# Altium PCB PCB2.PcbDoc
Units mil, origin at the board's own origin, x right, y up, seen from the top; angles counter-clockwise.
Board outline 6000 x 4000 mil, 2 copper layers (Top Layer, Bottom Layer); 128 components, 0 nets, 416 pads, 0 vias.
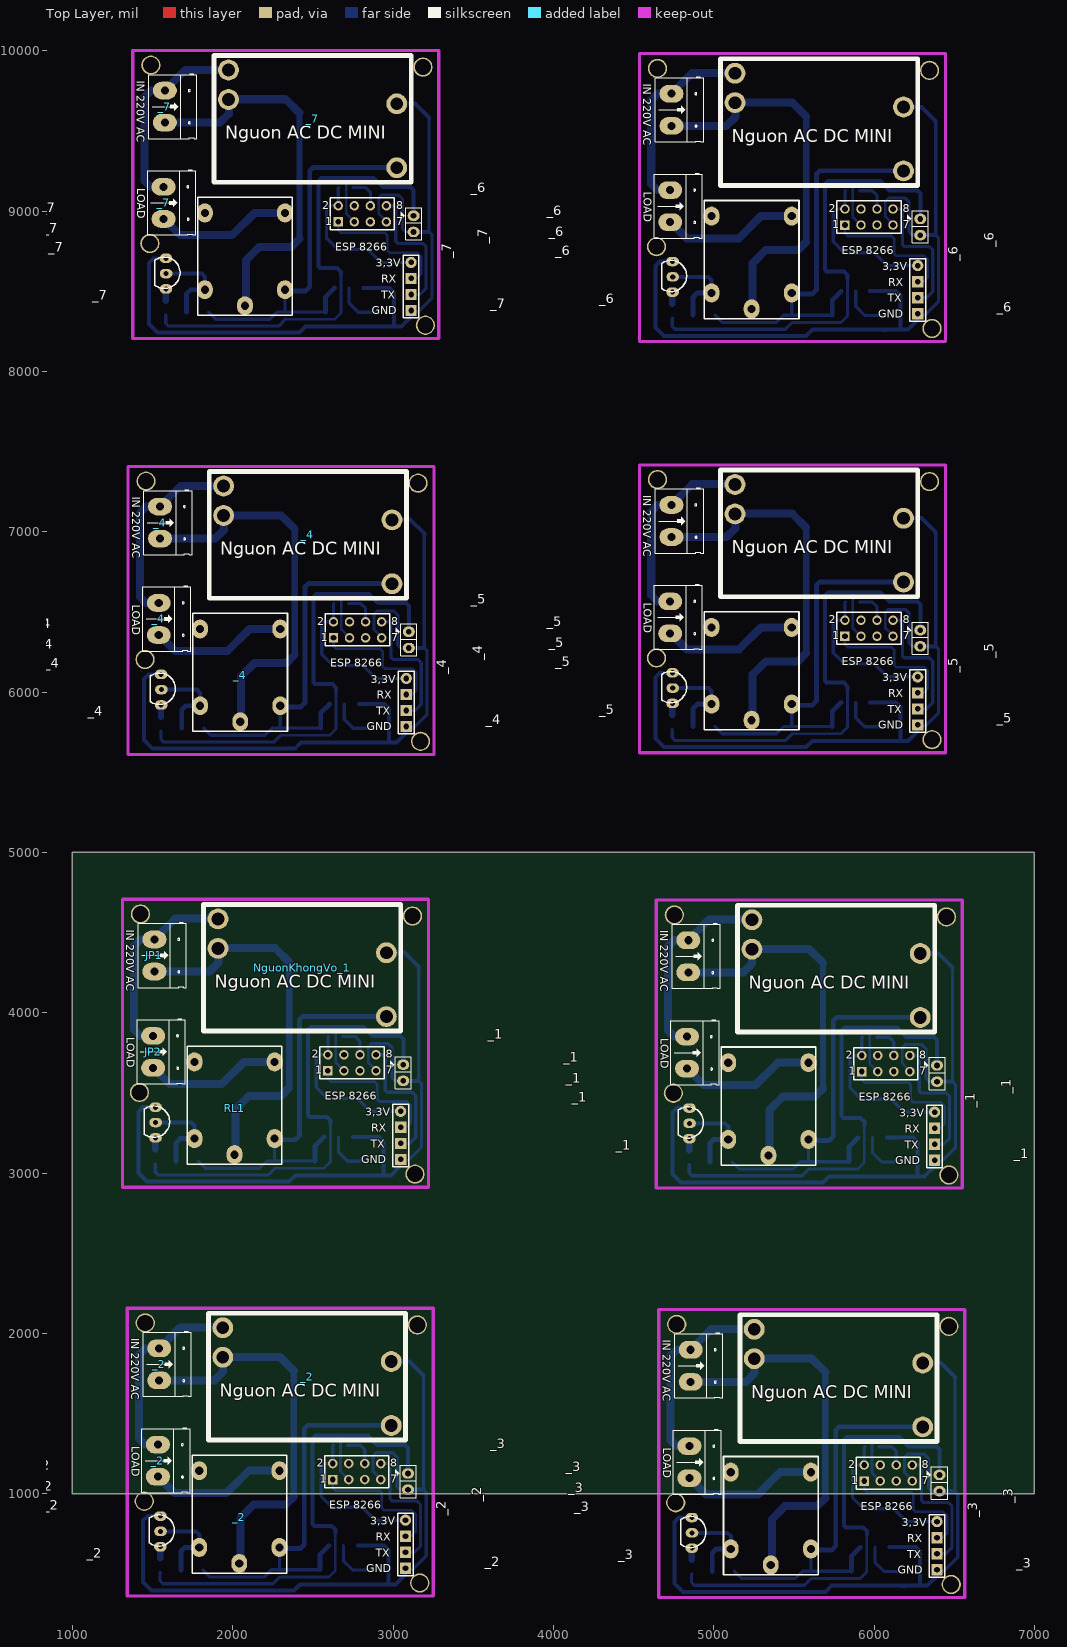
[diagram p0: Top Layer view]
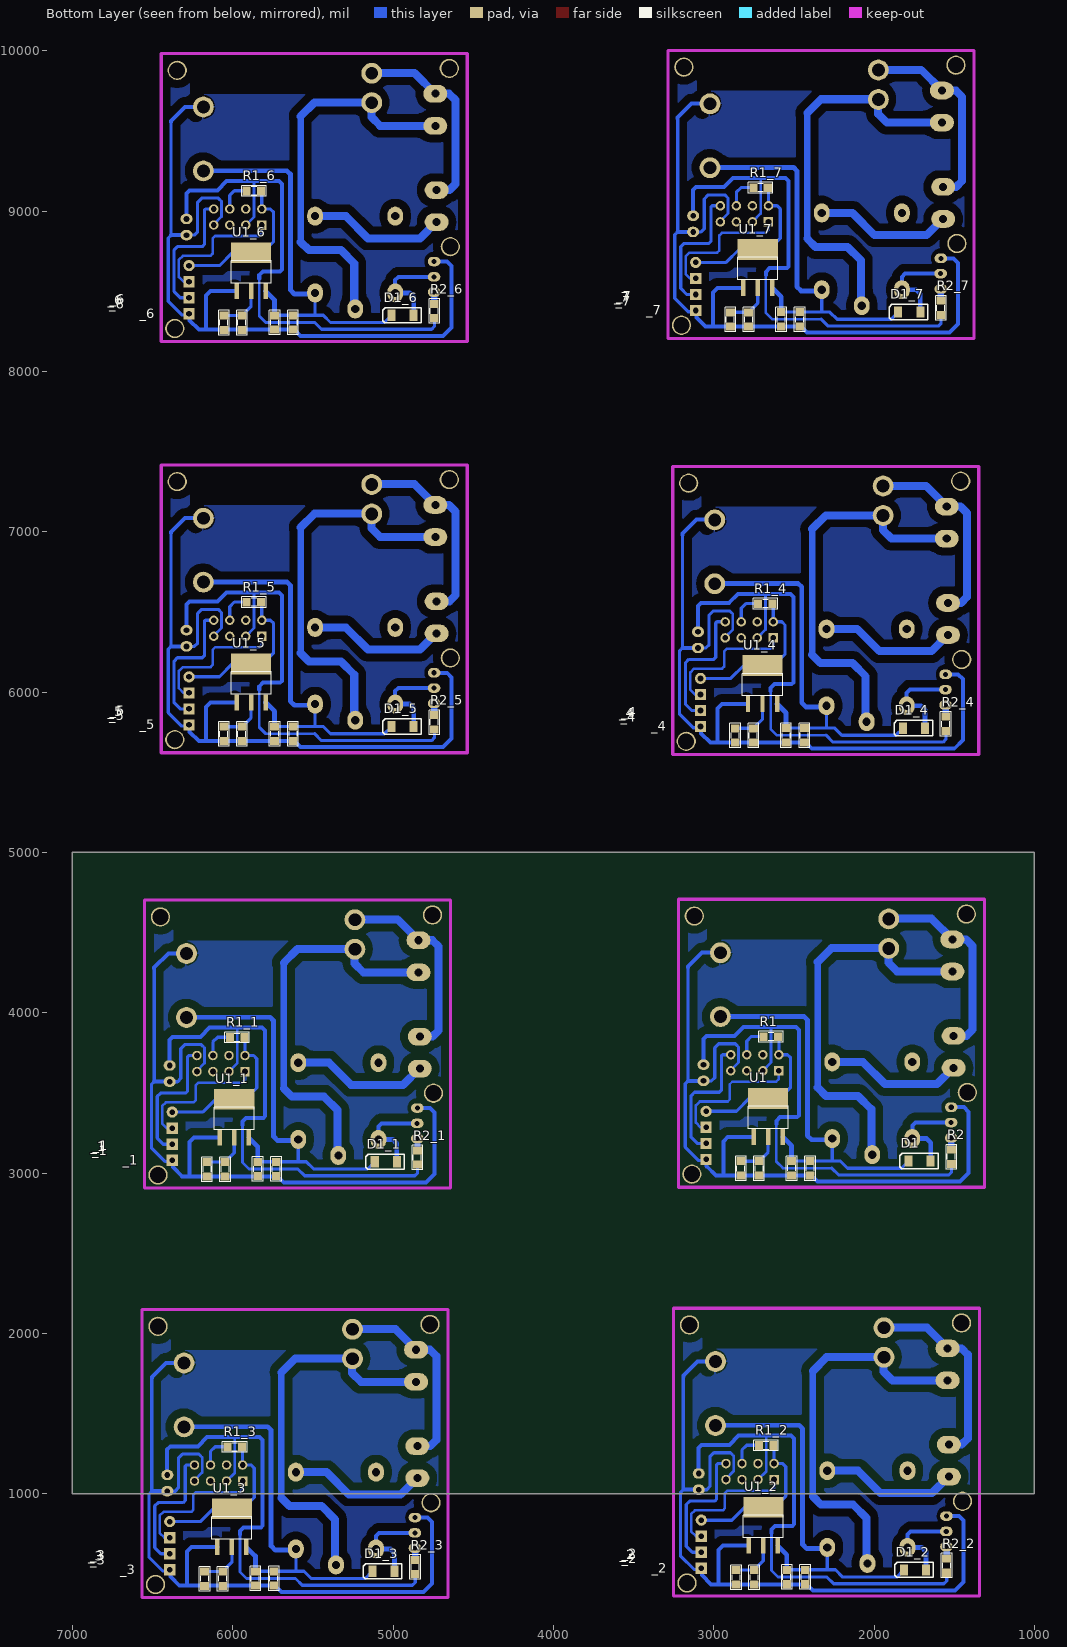
[diagram p1: Bottom Layer view, seen from below]

## Layer stack, top to bottom
Top Solder: solder mask 0.4, Solder Resist, Dk 3.5
Top Layer: signal copper 1.4
Dielectric 1: dielectric 12.6, FR-4, Dk 4.8
Bottom Layer: signal copper 1.4
Bottom Solder: solder mask 0.4, Solder Resist, Dk 3.5

## Board outline
1000,1000 7000,1000 7000,5000 1000,5000

## Design rules (kind name [scope] priority, off if disabled: settings)
Clearance [All] p1: gap=10 ignorepadtopadclearanceinfootprint=FALSE except(0: Arc-Hole Track-Hole SMDPad-Hole THPad-Hole Via-Hole Fill-Hole Poly-Hole Region-Hole Text-Hole)
PolygonConnect [All] p1: connectstyle=Relief reliefconductorwidth=10 reliefentries=4 polygonreliefangle="90 Angle" airgapwidth=10
RoutingVias [All] p1: holewidth=28 width=50 viastyle="Through Hole" minholewidth=28 minwidth=50 maxholewidth=28 maxwidth=50
SolderMaskExpansion [All] p1: expansion=4
Width [All] p1: maxlimit=10 minlimit=10 preferedwidth=10
30 further rules are at their usual default settings.

## Components (designator, comment, footprint, x,y, rotation, side; value= is the part's Value field where it differs from the comment)
_1 "106" 0805_MH 5728.92,3025.12 r90 bottom (schematic designator C1)
_1 "104" 0805_MH 5843.99,3025.12 r90 bottom (schematic designator C2)
_1 "106" 0805_MH 6047.48,3023.94 r90 bottom (schematic designator C3)
_1 "104" 0805_MH 6160.48,3023.94 r90 bottom (schematic designator C4)
_1 "Header 4" "Jumper 4" 6377.48,3328.94 r270 top (schematic designator HD1)
_1 "Jumper 2" JP2 6393.28,3670.96 r270 top (schematic designator J1)
_1 "esp8266" HDR2X4 5923.48,3632.94 r0 top (schematic designator P1)
_1 "Relay ?V - 10A" RELAY5PIN-10A 5341.23,3109.71 r0 top (schematic designator RL1)
_1 "C1815" TRAN-LOWPOWER 4843.54,3315.41 r180 top (schematic designator Q1)
_1 "NguonKhongVo_12v_400ma" NguonKhongVo_12V_400mA 5238.18,4580.09 r0 top (schematic designator NguonKhongVo_1)
_1 "JP2" "CON 2" 4841.48,4451.94 r270 top (schematic designator JP1)
_1 "JP2" "CON 2" 4833.48,3850.94 r270 top (schematic designator JP2)
_2 "106" 0805_MH 2428.92,480.12 r90 bottom (schematic designator C1)
_2 "104" 0805_MH 2543.99,480.12 r90 bottom (schematic designator C2)
_2 "106" 0805_MH 2747.48,478.94 r90 bottom (schematic designator C3)
_2 "104" 0805_MH 2860.48,478.94 r90 bottom (schematic designator C4)
_2 "Header 4" "Jumper 4" 3077.48,783.94 r270 top (schematic designator HD1)
_2 "Jumper 2" JP2 3093.28,1125.96 r270 top (schematic designator J1)
_2 "esp8266" HDR2X4 2623.48,1087.94 r0 top (schematic designator P1)
_2 "Relay ?V - 10A" RELAY5PIN-10A 2041.23,564.71 r0 top (schematic designator RL1)
_2 "C1815" TRAN-LOWPOWER 1543.54,770.41 r180 top (schematic designator Q1)
_2 "NguonKhongVo_12v_400ma" NguonKhongVo_12V_400mA 1938.18,2035.09 r0 top (schematic designator NguonKhongVo_1)
_2 "JP2" "CON 2" 1541.48,1906.94 r270 top (schematic designator JP1)
_2 "JP2" "CON 2" 1533.48,1305.94 r270 top (schematic designator JP2)
_3 "106" 0805_MH 5743.92,471 r90 bottom (schematic designator C1)
_3 "104" 0805_MH 5858.99,471 r90 bottom (schematic designator C2)
_3 "106" 0805_MH 6062.48,469.81 r90 bottom (schematic designator C3)
_3 "104" 0805_MH 6175.48,469.81 r90 bottom (schematic designator C4)
_3 "Header 4" "Jumper 4" 6392.48,774.81 r270 top (schematic designator HD1)
_3 "Jumper 2" JP2 6408.28,1116.84 r270 top (schematic designator J1)
_3 "esp8266" HDR2X4 5938.48,1078.81 r0 top (schematic designator P1)
_3 "Relay ?V - 10A" RELAY5PIN-10A 5356.23,555.59 r0 top (schematic designator RL1)
_3 "C1815" TRAN-LOWPOWER 4858.54,761.29 r180 top (schematic designator Q1)
_3 "NguonKhongVo_12v_400ma" NguonKhongVo_12V_400mA 5253.18,2025.97 r0 top (schematic designator NguonKhongVo_1)
_3 "JP2" "CON 2" 4856.48,1897.81 r270 top (schematic designator JP1)
_3 "JP2" "CON 2" 4848.48,1296.81 r270 top (schematic designator JP2)
_4 "106" 0805_MH 2433.92,5730.12 r90 bottom (schematic designator C1)
_4 "104" 0805_MH 2548.99,5730.12 r90 bottom (schematic designator C2)
_4 "106" 0805_MH 2752.48,5728.94 r90 bottom (schematic designator C3)
_4 "104" 0805_MH 2865.48,5728.94 r90 bottom (schematic designator C4)
_4 "Header 4" "Jumper 4" 3082.48,6033.94 r270 top (schematic designator HD1)
_4 "Jumper 2" JP2 3098.28,6375.96 r270 top (schematic designator J1)
_4 "esp8266" HDR2X4 2628.48,6337.94 r0 top (schematic designator P1)
_4 "Relay ?V - 10A" RELAY5PIN-10A 2046.23,5814.71 r0 top (schematic designator RL1)
_4 "C1815" TRAN-LOWPOWER 1548.54,6020.41 r180 top (schematic designator Q1)
_4 "NguonKhongVo_12v_400ma" NguonKhongVo_12V_400mA 1943.18,7285.09 r0 top (schematic designator NguonKhongVo_1)
_4 "JP2" "CON 2" 1546.48,7156.94 r270 top (schematic designator JP1)
_4 "JP2" "CON 2" 1538.48,6555.94 r270 top (schematic designator JP2)
_5 "106" 0805_MH 5623.92,5740.12 r90 bottom (schematic designator C1)
_5 "104" 0805_MH 5738.99,5740.12 r90 bottom (schematic designator C2)
_5 "106" 0805_MH 5942.48,5738.94 r90 bottom (schematic designator C3)
_5 "104" 0805_MH 6055.48,5738.94 r90 bottom (schematic designator C4)
_5 "Header 4" "Jumper 4" 6272.48,6043.94 r270 top (schematic designator HD1)
_5 "Jumper 2" JP2 6288.28,6385.96 r270 top (schematic designator J1)
_5 "esp8266" HDR2X4 5818.48,6347.94 r0 top (schematic designator P1)
_5 "Relay ?V - 10A" RELAY5PIN-10A 5236.23,5824.71 r0 top (schematic designator RL1)
_5 "C1815" TRAN-LOWPOWER 4738.54,6030.41 r180 top (schematic designator Q1)
_5 "NguonKhongVo_12v_400ma" NguonKhongVo_12V_400mA 5133.18,7295.09 r0 top (schematic designator NguonKhongVo_1)
_5 "JP2" "CON 2" 4736.48,7166.94 r270 top (schematic designator JP1)
_5 "JP2" "CON 2" 4728.48,6565.94 r270 top (schematic designator JP2)
_6 "106" 0805_MH 5623.92,8305.12 r90 bottom (schematic designator C1)
_6 "104" 0805_MH 5738.99,8305.12 r90 bottom (schematic designator C2)
_6 "106" 0805_MH 5942.48,8303.94 r90 bottom (schematic designator C3)
_6 "104" 0805_MH 6055.48,8303.94 r90 bottom (schematic designator C4)
_6 "Header 4" "Jumper 4" 6272.48,8608.94 r270 top (schematic designator HD1)
_6 "Jumper 2" JP2 6288.28,8950.96 r270 top (schematic designator J1)
_6 "esp8266" HDR2X4 5818.48,8912.94 r0 top (schematic designator P1)
_6 "Relay ?V - 10A" RELAY5PIN-10A 5236.23,8389.71 r0 top (schematic designator RL1)
_6 "C1815" TRAN-LOWPOWER 4738.54,8595.41 r180 top (schematic designator Q1)
_6 "NguonKhongVo_12v_400ma" NguonKhongVo_12V_400mA 5133.18,9860.09 r0 top (schematic designator NguonKhongVo_1)
_6 "JP2" "CON 2" 4736.48,9731.94 r270 top (schematic designator JP1)
_6 "JP2" "CON 2" 4728.48,9130.94 r270 top (schematic designator JP2)
_7 "106" 0805_MH 2463.92,8325.12 r90 bottom (schematic designator C1)
_7 "104" 0805_MH 2578.99,8325.12 r90 bottom (schematic designator C2)
_7 "106" 0805_MH 2782.48,8323.94 r90 bottom (schematic designator C3)
_7 "104" 0805_MH 2895.48,8323.94 r90 bottom (schematic designator C4)
_7 "Header 4" "Jumper 4" 3112.48,8628.94 r270 top (schematic designator HD1)
_7 "Jumper 2" JP2 3128.28,8970.96 r270 top (schematic designator J1)
_7 "esp8266" HDR2X4 2658.48,8932.94 r0 top (schematic designator P1)
_7 "Relay ?V - 10A" RELAY5PIN-10A 2076.23,8409.71 r0 top (schematic designator RL1)
_7 "C1815" TRAN-LOWPOWER 1578.54,8615.41 r180 top (schematic designator Q1)
_7 "NguonKhongVo_12v_400ma" NguonKhongVo_12V_400mA 1973.18,9880.09 r0 top (schematic designator NguonKhongVo_1)
_7 "JP2" "CON 2" 1576.48,9751.94 r270 top (schematic designator JP1)
_7 "JP2" "CON 2" 1568.48,9150.94 r270 top (schematic designator JP2)
C1 "106" 0805_MH 2398.92,3030.12 r90 bottom
C2 "104" 0805_MH 2513.99,3030.12 r90 bottom
C3 "106" 0805_MH 2717.48,3028.94 r90 bottom
C4 "104" 0805_MH 2830.48,3028.94 r90 bottom
D1 "1N4007" "Diode zenner" 1715.32,3074.74 r180 bottom
D1_1 "1N4007" "Diode zenner" 5045.32,3069.74 r180 bottom (schematic designator D1)
D1_2 "1N4007" "Diode zenner" 1745.32,524.74 r180 bottom (schematic designator D1)
D1_3 "1N4007" "Diode zenner" 5060.32,515.61 r180 bottom (schematic designator D1)
D1_4 "1N4007" "Diode zenner" 1750.32,5774.74 r180 bottom (schematic designator D1)
D1_5 "1N4007" "Diode zenner" 4940.32,5784.74 r180 bottom (schematic designator D1)
D1_6 "1N4007" "Diode zenner" 4940.32,8349.74 r180 bottom (schematic designator D1)
D1_7 "1N4007" "Diode zenner" 1780.32,8369.74 r180 bottom (schematic designator D1)
HD1 "Header 4" "Jumper 4" 3047.48,3333.94 r270 top
J1 "Jumper 2" JP2 3063.28,3675.96 r270 top
JP1 "JP2" "CON 2" 1511.48,4456.94 r270 top
JP2 "JP2" "CON 2" 1503.48,3855.94 r270 top
NguonKhongVo_1 "NguonKhongVo_12v_400ma" NguonKhongVo_12V_400mA 1908.18,4585.09 r0 top
P1 "esp8266" HDR2X4 2593.48,3637.94 r0 top
Q1 "C1815" TRAN-LOWPOWER 1513.54,3320.41 r180 top
R1 "10k" 0805_MH 2642.99,3850.28 r0 bottom
R1_1 "10k" 0805_MH 5972.99,3845.28 r0 bottom (schematic designator R1)
R1_2 "10k" 0805_MH 2672.99,1300.28 r0 bottom (schematic designator R1)
R1_3 "10k" 0805_MH 5987.99,1291.15 r0 bottom (schematic designator R1)
R1_4 "10k" 0805_MH 2677.99,6550.28 r0 bottom (schematic designator R1)
R1_5 "10k" 0805_MH 5867.99,6560.28 r0 bottom (schematic designator R1)
R1_6 "10k" 0805_MH 5867.99,9125.28 r0 bottom (schematic designator R1)
R1_7 "10k" 0805_MH 2707.99,9145.28 r0 bottom (schematic designator R1)
R2 "1k" 0805_MH 1517.66,3101.91 r90 bottom
R2_1 "1k" 0805_MH 4847.66,3096.91 r90 bottom (schematic designator R2)
R2_2 "1k" 0805_MH 1547.66,551.91 r90 bottom (schematic designator R2)
R2_3 "1k" 0805_MH 4862.66,542.78 r90 bottom (schematic designator R2)
R2_4 "1k" 0805_MH 1552.66,5801.91 r90 bottom (schematic designator R2)
R2_5 "1k" 0805_MH 4742.66,5811.91 r90 bottom (schematic designator R2)
R2_6 "1k" 0805_MH 4742.66,8376.91 r90 bottom (schematic designator R2)
R2_7 "1k" 0805_MH 1582.66,8396.91 r90 bottom (schematic designator R2)
RL1 "Relay ?V - 10A" RELAY5PIN-10A 2011.23,3114.71 r0 top
U1 "LM1117-3.3V" LM1117-SOP 2660.49,3275.55 r180 bottom
U1_1 "LM1117-3.3V" LM1117-SOP 5990.49,3270.55 r180 bottom (schematic designator U1)
U1_2 "LM1117-3.3V" LM1117-SOP 2690.49,725.54 r180 bottom (schematic designator U1)
U1_3 "LM1117-3.3V" LM1117-SOP 6005.49,716.42 r180 bottom (schematic designator U1)
U1_4 "LM1117-3.3V" LM1117-SOP 2695.49,5975.55 r180 bottom (schematic designator U1)
U1_5 "LM1117-3.3V" LM1117-SOP 5885.49,5985.55 r180 bottom (schematic designator U1)
U1_6 "LM1117-3.3V" LM1117-SOP 5885.49,8550.55 r180 bottom (schematic designator U1)
U1_7 "LM1117-3.3V" LM1117-SOP 2725.49,8570.55 r180 bottom (schematic designator U1)

## Footprints (in the part's own frame and the unit in brackets; to place one, negate y for a bottom-side part, rotate by r counter-clockwise, add the part's x,y. Pads: shape width x height; smd on the part's side, far side on the other; paste and mask are expansions set on the pad)
0805_MH [mil] "Compoment SMD 80x50mil"
  rect 50x55 smd: 1(-45,0) 2(45,0)
  silkscreen extent -77,-34 76,33, body extent -40,-27 40,23, height 24
"CON 2" [mil] "Header 2, 2 pin, hight 300mil, Pin to Pin 200, Colour Green"
  oval 110x149.61 hole 50: 1(0,0) 2(200,0)
  silkscreen extent -106,-100 300,200, body extent -97,-98 297,198, height 394
"Diode zenner" [mil]
  rect 50x70 smd: 1(68.9,0) 2(-68.9,0)
  silkscreen extent -125,-47 115,48
HDR2X4 [mm] "Connector; Header; 4x2 Position"
  rect 1.5x1.5 hole 0.9: 1(0,0)
  round 1.5 hole 0.9: 2(0,2.54) 3(2.54,0) 4(2.54,2.54) 5(5.08,0) 6(5.08,2.54) 7(7.62,0) 8(7.62,2.54)
  silkscreen extent -1.27,-1.27 8.89,3.81, body extent -1.27,-1.27 8.89,3.81, height 7
JP2 [mil]
  oval 65x75 hole 36: 1(0,0) 2(101,0)
  silkscreen extent -50,-81 150,50, body extent -48,-50 148,48, height 323
"Jumper 4" [mil]
  round 70 hole 35 unplated: 1(-51,0)
  rect 70x70 hole 35 unplated: 2(49,0) 3(149,0) 4(249,0)
  silkscreen extent -95,-49 295,49
LM1117-SOP [mm]
  rect 0.7x2.54 smd: 1(-2.3,-1.27) 2(0,-1.27) 3(2.3,-1.27)
  rect 6.35x3.302 smd: 2(0,4.826)
  silkscreen extent -3.17,0 3.18,3.56, body extent -3.25,-1.78 3.25,5.18, height 1.68
NguonKhongVo_12V_400mA [mil] "NguonKhongVo_12V_400mA"
  round 130 hole 80: 1(0,0) 2(0,-183.86) 3(1050.2,-609.45) 4(1050.2,-211.02)
  silkscreen extent -90,-700 1140,90
RELAY5PIN-10A [mm]
  oval 2.5x3 hole 1.3: 1(0,0) 2(-6.35,14.7) 3(6.35,14.7) 4(-6.35,2.54) 5(6.35,2.54)
  silkscreen extent -7.49,-1.52 7.51,17.18, body extent -7.49,-1.52 7.49,17.14, height 16
TRAN-LOWPOWER [mm] "TO, Flat Index; 3 In-Line, Axial Leads; Body Dia. 4.5mm; Leads 0.51 x 0.48 mm (max)"
  oval 2x1.5 hole 0.8: 1(-0.127,-2.286) 2(-0.151,0.139) 3(-0.127,2.564)
  silkscreen extent -2.35,-2.48 1.63,2.48, body extent -2.48,-2.79 1.52,3.01, height 11

## Part data
_1 _1 _1 _1 _2 _2 _2 _2 _3 _3 _3 _3 _4 _4 _4 _4 _5 _5 _5 _5 _6 _6 _6 _6 _7 _7 _7 _7 C1 C2 C3 C4: library part "CAP 0805"
_1 _2 _3 _4 _5 _6 _7 HD1: library part Hed4, "Header 4 (Green)"
_1 _2 _3 _4 _5 _6 _7 J1: library part "JP 2"
_1 _2 _3 _4 _5 _6 _7 P1: library part "Header 4X2", "Header, 4-Pin, Dual row"
_1 _2 _3 _4 _5 _6 _7 RL1: library part "Relay 10A", "Relay SPDT,10A - 12VDC 5 Pin"
_1 _2 _3 _4 _5 _6 _7 Q1: "NPN 600mW, ECB"
_1 _1 _2 _2 _3 _3 _4 _4 _5 _5 _6 _6 _7 _7 JP1 JP2: library part "JUMP 2", "JUMP DON DUC 2.54"
D1 D1_1 D1_2 D1_3 D1_4 D1_5 D1_6 D1_7: library part D1A, "Diode 1A"
R1 R1_1 R1_2 R1_3 R1_4 R1_5 R1_6 R1_7 R2 R2_1 R2_2 R2_3 R2_4 R2_5 R2_6 R2_7: library part R1/4W, "Resistor 1/4W"
U1 U1_1 U1_2 U1_3 U1_4 U1_5 U1_6 U1_7: library part LM1117, "800mA Low-Dropout Linear Regulator"

## Free pads (board coordinates)
  round 120 hole 100: 2(1418.06,3502.82) 2(1424.32,4615.12) 2(1448.06,952.82) 2(1453.06,6202.82) 2(1454.32,2065.12) 2(1459.32,7315.12) 2(1483.06,8797.82) 2(1489.32,9910.12) 2(3121.26,4602.77) 2(3136.46,2992.88) 2(3151.26,2052.77) 2(3156.26,7302.77) 2(3166.46,442.88) 2(3171.46,5692.88) 2(3186.26,9897.77) 2(3201.46,8287.88) 2(4643.06,6212.82) 2(4643.06,8777.82) 2(4649.32,7325.12) 2(4649.32,9890.12) 2(4748.06,3497.82) 2(4754.32,4610.12) 2(4763.06,943.69) 2(4769.32,2056) 2(6346.26,7312.77) 2(6346.26,9877.77) 2(6361.46,5702.88) 2(6361.46,8267.88) 2(6451.26,4597.77) 2(6466.26,2043.65) 2(6466.46,2987.88) 2(6481.46,433.75)

## Nets (pads, with @x,y where several pads share a name; then routed paths per layer and width w, separated by ;. In a path a pad name is that pad's centre, name@x,y a point inside that pad or via, vN(x,y) a via of type N, cw(c..) or ccw(c..) an arc to the next point about the centre after c; other vN are vias at no path point)
pads on no net: _1.1 _1.2 _1.3 _1.4 _1.5 _1.6 _1.7 _1.8 _2.1 _2.2 _2.3 _2.4 _2.5 _2.6 _2.7 _2.8 _3.1 _3.2 _3.3 _3.4 _3.5 _3.6 _3.7 _3.8 _4.1 _4.2 _4.3 _4.4 _4.5 _4.6 _4.7 _4.8 _5.1 _5.2 _5.3 _5.4 _5.5 _5.6 _5.7 _5.8 _6.1 _6.2 _6.3 _6.4 _6.5 _6.6 _6.7 _6.8 _7.1 _7.2 _7.3 _7.4 _7.5 _7.6 _7.7 _7.8 C1.1 C1.2 C2.1 C2.2 C3.1 C3.2 C4.1 C4.2 D1.1 D1.2 D1_1.1 D1_1.2 D1_2.1 D1_2.2 D1_3.1 D1_3.2 D1_4.1 D1_4.2 D1_5.1 D1_5.2 D1_6.1 D1_6.2 D1_7.1 D1_7.2 HD1.1 HD1.2 HD1.3 HD1.4 J1.1 J1.2 JP1.1 JP1.2 JP2.1 JP2.2 NguonKhongVo_1.1 NguonKhongVo_1.2 NguonKhongVo_1.3 NguonKhongVo_1.4 P1.1 P1.2 P1.3 P1.4 P1.5 P1.6 P1.7 P1.8 Q1.1 Q1.2 Q1.3 R1.1 R1.2 R1_1.1 R1_1.2 R1_2.1 R1_2.2 R1_3.1 R1_3.2 R1_4.1 R1_4.2 R1_5.1 R1_5.2 R1_6.1 R1_6.2 R1_7.1 R1_7.2 R2.1 R2.2 R2_1.1 R2_1.2 R2_2.1 R2_2.2 R2_3.1 R2_3.2 R2_4.1 R2_4.2 R2_5.1 R2_5.2 R2_6.1 R2_6.2 R2_7.1 R2_7.2 RL1.1 RL1.2 RL1.3 RL1.4 RL1.5 U1.1 U1.2 U1.3 U1_1.1 U1_1.2 U1_1.3 U1_2.1 U1_2.2 U1_2.3 U1_3.1 U1_3.2 U1_3.3 U1_4.1 U1_4.2 U1_4.3 U1_5.1 U1_5.2 U1_5.3 U1_6.1 U1_6.2 U1_6.3 U1_7.1 U1_7.2 U1_7.3
copper on no net: | length 152637.5
  Bottom Layer w16: 2593.48,3637.94 2593.48,3587.23 2611.28,3569.43 2884.28,3569.43 2900.02,3553.69 2900.02,3459.51 2913.45,3446.09 3086.61,3446.09 3110.75,3421.94 3110.75,3313.86 3081.83,3284.94 3047.48,3284.94 ; 2623.48,1087.94 2623.48,1037.23 2641.28,1019.43 2914.28,1019.43 2930.02,1003.69 2930.02,909.51 2943.45,896.09 3116.61,896.09 3140.75,871.94 3140.75,763.86 3111.83,734.94 3077.48,734.94 ; 2628.48,6337.94 2628.48,6287.23 2646.28,6269.43 2919.28,6269.43 2935.02,6253.69 2935.02,6159.52 2948.45,6146.09 3121.61,6146.09 3145.75,6121.94 3145.75,6013.86 3116.83,5984.94 3082.48,5984.94 ; 2658.48,8932.94 2658.48,8882.23 2676.28,8864.43 2949.28,8864.43 2965.02,8848.69 2965.02,8754.51 2978.45,8741.09 3151.61,8741.09 3175.75,8716.94 3175.75,8608.86 3146.83,8579.94 3112.48,8579.94 ; 5818.48,6347.94 5818.48,6297.23 5836.28,6279.43 6109.28,6279.43 6125.02,6263.69 6125.02,6169.52 6138.45,6156.09 6311.6,6156.09 6335.75,6131.94 6335.75,6023.86 6306.83,5994.94 6272.48,5994.94 ; 5818.48,8912.94 5818.48,8862.23 5836.28,8844.43 6109.28,8844.43 6125.02,8828.69 6125.02,8734.51 6138.45,8721.09 6311.6,8721.09 6335.75,8696.94 6335.75,8588.86 6306.83,8559.94 6272.48,8559.94 ; 5923.48,3632.94 5923.48,3582.23 5941.28,3564.43 6214.28,3564.43 6230.02,3548.69 6230.02,3454.51 6243.45,3441.09 6416.6,3441.09 6440.75,3416.94 6440.75,3308.86 6411.83,3279.94 6377.48,3279.94 ; 5938.48,1078.81 5938.48,1028.11 5956.28,1010.31 6229.28,1010.31 6245.02,994.56 6245.02,900.39 6258.45,886.96 6431.6,886.96 6455.75,862.82 6455.75,754.74 6426.83,725.81 6392.48,725.81
  Bottom Layer w17: 2263.73,3030.12 2569.17,3030.12 2609.67,3070.62 2609.67,3305.48 ; 2293.73,480.12 2599.17,480.12 2639.67,520.62 2639.67,755.48 ; 2298.73,5730.12 2604.17,5730.12 2644.67,5770.62 2644.67,6005.48 ; 2328.73,8325.12 2634.17,8325.12 2674.67,8365.62 2674.67,8600.48 ; 2642.4,3905.59 2642.4,3689.02 2693.48,3637.94 ; 2672.4,1355.59 2672.4,1139.02 2723.48,1087.94 ; 2677.4,6605.59 2677.4,6389.02 2728.48,6337.94 ; 2707.4,9200.59 2707.4,8984.02 2758.48,8932.94 ; 2855.89,3796.5 2845.45,3786.06 2845.45,3690.1 2893.48,3642.07 2893.48,3637.94 ; 2885.89,1246.5 2875.45,1236.06 2875.45,1140.1 2923.48,1092.08 2923.48,1087.94 ; 2890.89,6496.5 2880.45,6486.06 2880.45,6390.1 2928.48,6342.07 2928.48,6337.94 ; 2920.89,9091.5 2910.45,9081.06 2910.45,8985.1 2958.48,8937.08 2958.48,8932.94 ; 5488.73,5740.12 5794.17,5740.12 5834.67,5780.62 5834.67,6015.48 ; 5488.73,8305.12 5794.17,8305.12 5834.67,8345.62 5834.67,8580.48 ; 5593.73,3025.12 5899.17,3025.12 5939.67,3065.62 5939.67,3300.48 ; 5608.73,471 5914.17,471 5954.67,511.5 5954.67,746.36 ; 5867.4,6615.59 5867.4,6399.02 5918.48,6347.94 ; 5867.4,9180.59 5867.4,8964.02 5918.48,8912.94 ; 5972.4,3900.59 5972.4,3684.02 6023.48,3632.94 ; 5987.4,1346.46 5987.4,1129.9 6038.48,1078.81 ; 6080.9,6506.5 6070.45,6496.06 6070.45,6400.1 6118.48,6352.07 6118.48,6347.94 ; 6080.9,9071.5 6070.45,9061.06 6070.45,8965.1 6118.48,8917.08 6118.48,8912.94 ; 6185.9,3791.5 6175.45,3781.06 6175.45,3685.1 6223.48,3637.07 6223.48,3632.94 ; 6200.9,1237.38 6190.45,1226.93 6190.45,1130.98 6238.48,1082.95 6238.48,1078.81
  Bottom Layer w20: 1517.66,3056.91 1516.95,3056.2 1516.95,3005.19 1534.52,2987.61 2221.22,2987.61 2263.73,3030.12 ; 1547.66,506.91 1546.95,506.2 1546.95,455.19 1564.52,437.61 2251.22,437.61 2293.73,480.12 ; 1552.66,5756.91 1551.95,5756.2 1551.95,5705.19 1569.52,5687.61 2256.22,5687.61 2298.73,5730.12 ; 1582.66,8351.91 1581.95,8351.2 1581.95,8300.19 1599.52,8282.61 2286.22,8282.61 2328.73,8325.12 ; 1784.22,3074.74 1828.89,3030.07 2165.27,3030.07 2210.33,3075.12 2398.92,3075.12 2513.99,3075.12 ; 1814.22,524.74 1858.89,480.07 2195.27,480.07 2240.33,525.12 2428.92,525.12 2543.99,525.12 ; 1819.22,5774.74 1863.89,5730.07 2200.27,5730.07 2245.33,5775.12 2433.92,5775.12 2548.99,5775.12 ; 1849.22,8369.74 1893.89,8325.07 2230.27,8325.07 2275.33,8370.12 2463.92,8370.12 2578.99,8370.12 ; 2261.23,3077.46 2261.23,3214.71 ; 2291.23,527.46 2291.23,664.71 ; 2296.23,5777.46 2296.23,5914.71 ; 2326.23,8372.46 2326.23,8509.71 ; 2596.48,3851.94 2593.48,3848.94 2593.48,3737.94 2539.85,3737.94 2520.37,3718.46 2520.37,3535.19 2590.01,3465.55 2660.49,3465.55 2777.14,3465.55 2857.74,3384.94 3047.48,3384.94 ; 2626.48,1301.94 2623.48,1298.94 2623.48,1187.94 2569.85,1187.94 2550.37,1168.46 2550.37,985.19 2620.01,915.54 2690.49,915.54 2807.14,915.54 2887.74,834.94 3077.48,834.94 ; 2631.48,6551.94 2628.48,6548.94 2628.48,6437.94 2574.85,6437.94 2555.37,6418.46 2555.37,6235.19 2625.01,6165.55 2695.49,6165.55 2812.14,6165.55 2892.74,6084.94 3082.48,6084.94 ; 2660.49,3225.55 2660.49,3130.92 2717.48,3073.94 2830.48,3073.94 ; 2661.48,9146.94 2658.48,9143.94 2658.48,9032.94 2604.85,9032.94 2585.37,9013.46 2585.37,8830.19 2655.01,8760.55 2725.49,8760.55 2842.14,8760.55 2922.74,8679.94 3112.48,8679.94 ; 2686.48,3851.94 2764.48,3851.94 2793.48,3822.94 2793.48,3737.94 ; 2690.49,675.54 2690.49,580.92 2747.48,523.94 2860.48,523.94 ; 2695.49,5925.55 2695.49,5830.92 2752.48,5773.94 2865.48,5773.94 ; 2716.48,1301.94 2794.48,1301.94 2823.48,1272.94 2823.48,1187.94 ; 2721.48,6551.94 2799.48,6551.94 2828.48,6522.94 2828.48,6437.94 ; 2725.49,8520.55 2725.49,8425.92 2782.48,8368.94 2895.48,8368.94 ; 2751.48,9146.94 2829.48,9146.94 2858.48,9117.94 2858.48,9032.94 ; 2855.89,3796.5 2865.22,3805.83 2968.78,3805.83 2993.98,3780.64 2993.98,3594.98 3013.99,3574.96 3063.28,3574.96 ; 2885.89,1246.5 2895.22,1255.83 2998.78,1255.83 3023.98,1230.64 3023.98,1044.98 3043.99,1024.96 3093.28,1024.96 ; 2890.89,6496.5 2900.22,6505.83 3003.78,6505.83 3028.98,6480.64 3028.98,6294.98 3048.99,6274.96 3098.28,6274.96 ; 2893.48,3737.94 2945.25,3737.94 2951.72,3731.47 2951.72,3516.6 2964.59,3503.74 3119.98,3503.74 3140.98,3482.74 3140.98,3222.74 3103.18,3184.94 3047.48,3184.94 ; 2920.89,9091.5 2930.22,9100.83 3033.78,9100.83 3058.98,9075.64 3058.98,8889.98 3078.99,8869.96 3128.28,8869.96 ; 2923.48,1187.94 2975.25,1187.94 2981.72,1181.46 2981.72,966.6 2994.59,953.74 3149.98,953.74 3170.98,932.74 3170.98,672.74 3133.18,634.94 3077.48,634.94 ; 2928.48,6437.94 2980.25,6437.94 2986.72,6431.47 2986.72,6216.6 2999.59,6203.74 3154.98,6203.74 3175.98,6182.74 3175.98,5922.74 3138.18,5884.94 3082.48,5884.94 ; 2958.48,9032.94 3010.25,9032.94 3016.72,9026.47 3016.72,8811.6 3029.59,8798.74 3184.98,8798.74 3205.98,8777.74 3205.98,8517.74 3168.18,8479.94 3112.48,8479.94 ; 3047.48,3084.94 3054.98,3077.44 3093.2,3077.44 3177.53,3161.77 3177.53,3557.06 3159.79,3574.8 3159.79,4281.12 ; 3077.48,534.94 3084.98,527.44 3123.2,527.44 3207.53,611.77 3207.53,1007.06 3189.79,1024.8 3189.79,1731.12 ; 3082.48,5784.94 3089.98,5777.44 3128.2,5777.44 3212.53,5861.77 3212.53,6257.06 3194.79,6274.8 3194.79,6981.12 ; 3112.48,8379.94 3119.98,8372.44 3158.2,8372.44 3242.53,8456.77 3242.53,8852.06 3224.79,8869.8 3224.79,9576.12 ; 4742.66,5766.91 4741.95,5766.2 4741.95,5715.19 4759.52,5697.61 5446.22,5697.61 5488.73,5740.12 ; 4742.66,8331.91 4741.95,8331.2 4741.95,8280.19 4759.52,8262.61 5446.22,8262.61 5488.73,8305.12 ; 4847.66,3051.91 4846.95,3051.2 4846.95,3000.19 4864.52,2982.61 5551.22,2982.61 5593.73,3025.12 ; 4862.66,497.78 4861.95,497.07 4861.95,446.06 4879.52,428.49 5566.22,428.49 5608.73,471 ; 5009.22,5784.74 5053.89,5740.07 5390.27,5740.07 5435.33,5785.12 5623.92,5785.12 5738.99,5785.12 ; 5009.22,8349.74 5053.89,8305.07 5390.27,8305.07 5435.33,8350.12 5623.92,8350.12 5738.99,8350.12 ; 5114.22,3069.74 5158.89,3025.07 5495.27,3025.07 5540.33,3070.12 5728.92,3070.12 5843.99,3070.12 ; 5129.22,515.61 5173.89,470.94 5510.27,470.94 5555.33,516 5743.92,516 5858.99,516 ; 5486.23,5787.46 5486.23,5924.71 ; 5486.23,8352.46 5486.23,8489.71 ; 5591.23,3072.46 5591.23,3209.71 ; 5606.23,518.33 5606.23,655.59 ; 5821.48,6561.94 5818.48,6558.94 5818.48,6447.94 5764.85,6447.94 5745.37,6428.46 5745.37,6245.19 5815.02,6175.55 5885.49,6175.55 6002.14,6175.55 6082.74,6094.94 6272.48,6094.94 ; 5821.48,9126.94 5818.48,9123.94 5818.48,9012.94 5764.85,9012.94 5745.37,8993.46 5745.37,8810.19 5815.02,8740.55 5885.49,8740.55 6002.14,8740.55 6082.74,8659.94 6272.48,8659.94 ; 5885.49,5935.55 5885.49,5840.92 5942.48,5783.94 6055.48,5783.94 ; 5885.49,8500.55 5885.49,8405.92 5942.48,8348.94 6055.48,8348.94 ; 5911.48,6561.94 5989.48,6561.94 6018.48,6532.94 6018.48,6447.94 ; 5911.48,9126.94 5989.48,9126.94 6018.48,9097.94 6018.48,9012.94 ; 5926.48,3846.94 5923.48,3843.94 5923.48,3732.94 5869.85,3732.94 5850.37,3713.46 5850.37,3530.19 5920.02,3460.55 5990.49,3460.55 6107.14,3460.55 6187.74,3379.94 6377.48,3379.94 ; 5941.48,1292.81 5938.48,1289.81 5938.48,1178.81 5884.85,1178.81 5865.37,1159.34 5865.37,976.06 5935.02,906.42 6005.49,906.42 6122.14,906.42 6202.74,825.81 6392.48,825.81 ; 5990.49,3220.55 5990.49,3125.92 6047.48,3068.94 6160.48,3068.94 ; 6005.49,666.42 6005.49,571.8 6062.48,514.81 6175.48,514.81 ; 6016.48,3846.94 6094.48,3846.94 6123.48,3817.94 6123.48,3732.94 ; 6031.48,1292.81 6109.48,1292.81 6138.48,1263.81 6138.48,1178.81 ; 6080.9,6506.5 6090.23,6515.83 6193.78,6515.83 6218.98,6490.64 6218.98,6304.98 6238.99,6284.96 6288.28,6284.96 ; 6080.9,9071.5 6090.23,9080.83 6193.78,9080.83 6218.98,9055.64 6218.98,8869.98 6238.99,8849.96 6288.28,8849.96 ; 6118.48,6447.94 6170.25,6447.94 6176.73,6441.47 6176.73,6226.6 6189.59,6213.74 6344.98,6213.74 6365.98,6192.74 6365.98,5932.74 6328.18,5894.94 6272.48,5894.94 ; 6118.48,9012.94 6170.25,9012.94 6176.73,9006.47 6176.73,8791.6 6189.59,8778.74 6344.98,8778.74 6365.98,8757.74 6365.98,8497.74 6328.18,8459.94 6272.48,8459.94 ; 6185.9,3791.5 6195.23,3800.83 6298.78,3800.83 6323.98,3775.64 6323.98,3589.98 6343.99,3569.96 6393.28,3569.96 ; 6200.9,1237.38 6210.23,1246.71 6313.78,1246.71 6338.98,1221.51 6338.98,1035.85 6358.99,1015.84 6408.28,1015.84 ; 6223.48,3732.94 6275.25,3732.94 6281.73,3726.47 6281.73,3511.6 6294.59,3498.74 6449.98,3498.74 6470.98,3477.74 6470.98,3217.74 6433.18,3179.94 6377.48,3179.94 ; 6238.48,1178.81 6290.25,1178.81 6296.73,1172.34 6296.73,957.48 6309.59,944.61 6464.98,944.61 6485.98,923.61 6485.98,663.62 6448.18,625.81 6392.48,625.81 ; 6272.48,5794.94 6279.98,5787.44 6318.2,5787.44 6402.53,5871.77 6402.53,6267.06 6384.79,6284.8 6384.79,6991.12 ; 6272.48,8359.94 6279.98,8352.44 6318.2,8352.44 6402.53,8436.77 6402.53,8832.06 6384.79,8849.8 6384.79,9556.12 ; 6377.48,3079.94 6384.98,3072.44 6423.2,3072.44 6507.53,3156.77 6507.53,3552.06 6489.79,3569.8 6489.79,4276.12 ; 6392.48,525.81 6399.98,518.31 6438.2,518.31 6522.53,602.65 6522.53,997.94 6504.79,1015.67 6504.79,1721.99
  Bottom Layer w25: 1518.54,3410.41 1439.95,3410.41 1411.48,3381.94 1411.48,2999.73 1464.76,2946.45 2351.78,2946.45 2390.27,2984.94 2717.48,2984.94 2940.45,2984.94 ; 1519.48,3314.94 1741.81,3314.94 1761.6,3295.15 1761.6,3215.95 ; 1548.54,860.41 1469.95,860.41 1441.48,831.94 1441.48,449.73 1494.76,396.45 2381.78,396.45 2420.27,434.94 2747.48,434.94 2970.45,434.94 ; 1549.48,764.94 1771.81,764.94 1791.6,745.15 1791.6,665.95 ; 1553.54,6110.41 1474.95,6110.41 1446.48,6081.94 1446.48,5699.73 1499.76,5646.45 2386.78,5646.45 2425.27,5684.94 2752.48,5684.94 2975.45,5684.94 ; 1554.48,6014.94 1776.81,6014.94 1796.6,5995.15 1796.6,5915.95 ; 1583.54,8705.41 1504.95,8705.41 1476.48,8676.94 1476.48,8294.73 1529.76,8241.45 2416.78,8241.45 2455.27,8279.94 2782.48,8279.94 3005.45,8279.94 ; 1584.48,8609.94 1806.81,8609.94 1826.6,8590.15 1826.6,8510.95 ; 2609.67,3305.48 2609.67,3325.91 2586.49,3349.09 2479.16,3349.09 2468.53,3359.72 2468.53,3893.52 2486.75,3911.74 2814.3,3911.74 2871.16,3854.88 3044.73,3854.88 3063.95,3835.67 3063.95,3698.15 3041.93,3676.13 ; 2639.67,755.48 2639.67,775.91 2616.49,799.09 2509.16,799.09 2498.53,809.72 2498.53,1343.52 2516.75,1361.74 2844.3,1361.74 2901.16,1304.88 3074.73,1304.88 3093.95,1285.67 3093.95,1148.15 3071.93,1126.13 ; 2644.67,6005.48 2644.67,6025.91 2621.49,6049.09 2514.16,6049.09 2503.53,6059.72 2503.53,6593.52 2521.75,6611.74 2849.3,6611.74 2906.16,6554.88 3079.73,6554.88 3098.95,6535.67 3098.95,6398.15 3076.93,6376.13 ; 2674.67,8600.48 2674.67,8620.91 2651.49,8644.09 2544.16,8644.09 2533.53,8654.72 2533.53,9188.52 2551.75,9206.74 2879.3,9206.74 2936.16,9149.88 3109.73,9149.88 3128.95,9130.67 3128.95,8993.15 3106.93,8971.13 ; 2751.05,3225.55 2912.45,3225.55 2940.45,3197.55 2940.45,2984.94 ; 2781.05,675.54 2942.45,675.54 2970.45,647.55 2970.45,434.94 ; 2786.05,5925.55 2947.45,5925.55 2975.45,5897.55 2975.45,5684.94 ; 2816.05,8520.55 2977.45,8520.55 3005.45,8492.55 3005.45,8279.94 ; 2830.48,2983.94 2852.48,2983.94 ; 2860.48,433.94 2882.48,433.94 ; 2865.48,5683.94 2887.48,5683.94 ; 2895.48,8278.94 2917.48,8278.94 ; 2960.48,4375.36 3072.08,4375.36 3159.79,4287.65 3159.79,4281.12 ; 2990.48,1825.36 3102.08,1825.36 3189.79,1737.65 3189.79,1731.12 ; 2995.48,7075.36 3107.08,7075.36 3194.79,6987.65 3194.79,6981.12 ; 3025.48,9670.36 3137.08,9670.36 3224.79,9582.65 3224.79,9576.12 ; 3047.48,3084.94 3043.48,3080.94 3043.48,3042.35 2986.07,2984.94 2940.45,2984.94 ; 3054.84,3578 3089.41,3578 ; 3063.28,3574.96 3159.63,3574.96 3159.79,3574.8 ; 3077.48,534.94 3073.48,530.94 3073.48,492.35 3016.07,434.94 2970.45,434.94 ; 3082.48,5784.94 3078.48,5780.94 3078.48,5742.35 3021.07,5684.94 2975.45,5684.94 ; 3084.84,1028 3119.41,1028 ; 3089.84,6278 3124.41,6278 ; 3093.28,1024.96 3189.63,1024.96 3189.79,1024.8 ; 3098.28,6274.96 3194.63,6274.96 3194.79,6274.8 ; 3112.48,8379.94 3108.48,8375.94 3108.48,8337.35 3051.07,8279.94 3005.45,8279.94 ; 3119.84,8873 3154.41,8873 ; 3128.28,8869.96 3224.63,8869.96 3224.79,8869.8 ; 4743.54,6120.41 4664.95,6120.41 4636.48,6091.94 4636.48,5709.73 4689.76,5656.45 5576.78,5656.45 5615.27,5694.94 5942.48,5694.94 6165.45,5694.94 ; 4743.54,8685.41 4664.95,8685.41 4636.48,8656.94 4636.48,8274.73 4689.76,8221.45 5576.78,8221.45 5615.27,8259.94 5942.48,8259.94 6165.45,8259.94 ; 4744.48,6024.94 4966.81,6024.94 4986.6,6005.15 4986.6,5925.95 ; 4744.48,8589.94 4966.81,8589.94 4986.6,8570.15 4986.6,8490.95 ; 4848.54,3405.41 4769.95,3405.41 4741.48,3376.94 4741.48,2994.73 4794.76,2941.45 5681.78,2941.45 5720.27,2979.94 6047.48,2979.94 6270.45,2979.94 ; 4849.48,3309.94 5071.81,3309.94 5091.6,3290.15 5091.6,3210.95 ; 4863.54,851.29 4784.95,851.29 4756.48,822.81 4756.48,440.61 4809.76,387.33 5696.78,387.33 5735.27,425.81 6062.48,425.81 6285.45,425.81 ; 4864.48,755.81 5086.81,755.81 5106.6,736.03 5106.6,656.82 ; 5834.67,6015.48 5834.67,6035.91 5811.49,6059.09 5704.16,6059.09 5693.53,6069.72 5693.53,6603.52 5711.75,6621.74 6039.31,6621.74 6096.16,6564.88 6269.73,6564.88 6288.95,6545.67 6288.95,6408.15 6266.94,6386.13 ; 5834.67,8580.48 5834.67,8600.91 5811.49,8624.09 5704.16,8624.09 5693.53,8634.72 5693.53,9168.52 5711.75,9186.74 6039.31,9186.74 6096.16,9129.88 6269.73,9129.88 6288.95,9110.67 6288.95,8973.15 6266.94,8951.13 ; 5939.67,3300.48 5939.67,3320.91 5916.49,3344.09 5809.16,3344.09 5798.53,3354.72 5798.53,3888.52 5816.75,3906.74 6144.31,3906.74 6201.16,3849.88 6374.73,3849.88 6393.95,3830.67 6393.95,3693.15 6371.94,3671.13 ; 5954.67,746.36 5954.67,766.79 5931.49,789.96 5824.16,789.96 5813.53,800.6 5813.53,1334.4 5831.75,1352.62 6159.31,1352.62 6216.16,1295.76 6389.73,1295.76 6408.95,1276.54 6408.95,1139.02 6386.94,1117.01 ; 5976.05,5935.55 6137.45,5935.55 6165.45,5907.55 6165.45,5694.94 ; 5976.05,8500.55 6137.45,8500.55 6165.45,8472.55 6165.45,8259.94 ; 6055.48,5693.94 6077.48,5693.94 ; 6055.48,8258.94 6077.48,8258.94 ; 6081.05,3220.55 6242.45,3220.55 6270.45,3192.55 6270.45,2979.94 ; 6096.05,666.42 6257.45,666.42 6285.45,638.42 6285.45,425.81 ; 6160.48,2978.94 6182.48,2978.94 ; 6175.48,424.81 6197.48,424.81 ; 6185.48,7085.36 6297.08,7085.36 6384.79,6997.65 6384.79,6991.12 ; 6185.48,9650.36 6297.08,9650.36 6384.79,9562.65 6384.79,9556.12 ; 6272.48,5794.94 6268.48,5790.94 6268.48,5752.35 6211.07,5694.94 6165.45,5694.94 ; 6272.48,8359.94 6268.48,8355.94 6268.48,8317.35 6211.07,8259.94 6165.45,8259.94 ; 6279.84,6288 6314.41,6288 ; 6279.84,8853 6314.41,8853 ; 6288.28,6284.96 6384.63,6284.96 6384.79,6284.8 ; 6288.28,8849.96 6384.63,8849.96 6384.79,8849.8 ; 6290.48,4370.36 6402.08,4370.36 6489.79,4282.65 6489.79,4276.12 ; 6305.48,1816.24 6417.08,1816.24 6504.79,1728.53 6504.79,1721.99 ; 6377.48,3079.94 6373.48,3075.94 6373.48,3037.35 6316.07,2979.94 6270.45,2979.94 ; 6384.84,3573 6419.41,3573 ; 6392.48,525.81 6388.48,521.81 6388.48,483.22 6331.07,425.81 6285.45,425.81 ; 6393.28,3569.96 6489.63,3569.96 6489.79,3569.8 ; 6399.84,1018.88 6434.41,1018.88 ; 6408.28,1015.84 6504.63,1015.84 6504.79,1015.67
  Bottom Layer w30: 1646.42,3074.74 1646.42,3189.27 1671.86,3214.71 1761.23,3214.71 ; 1676.42,524.74 1676.42,639.27 1701.86,664.71 1791.23,664.71 ; 1681.42,5774.74 1681.42,5889.27 1706.86,5914.71 1796.23,5914.71 ; 1711.42,8369.74 1711.42,8484.27 1736.86,8509.71 1826.23,8509.71 ; 2011.23,3114.71 2017.06,3120.54 ; 2041.23,564.71 2047.06,570.54 ; 2046.23,5814.71 2052.06,5820.54 ; 2076.23,8409.71 2082.06,8415.54 ; 2261.23,3214.71 2268.53,3207.42 2389.91,3207.42 2415.68,3233.19 2415.68,3955.48 2437.14,3976.94 2960.48,3976.94 ; 2261.23,3694.68 2270.48,3694.68 ; 2291.23,664.71 2298.53,657.42 2419.91,657.42 2445.68,683.19 2445.68,1405.48 2467.14,1426.94 2990.48,1426.94 ; 2291.23,1144.68 2300.48,1144.68 ; 2296.23,5914.71 2303.53,5907.42 2424.91,5907.42 2450.68,5933.19 2450.68,6655.48 2472.14,6676.94 2995.48,6676.94 ; 2296.23,6394.68 2305.48,6394.68 ; 2326.23,8509.71 2333.53,8502.42 2454.91,8502.42 2480.68,8528.19 2480.68,9250.48 2502.14,9271.94 3025.48,9271.94 ; 2326.23,8989.68 2335.48,8989.68 ; 2513.99,3075.12 2513.99,3169.59 2569.94,3225.55 ; 2543.99,525.12 2543.99,619.59 2599.94,675.54 ; 2548.99,5775.12 2548.99,5869.59 2604.94,5925.55 ; 2578.99,8370.12 2578.99,8464.59 2634.94,8520.55 ; 4871.42,5784.74 4871.42,5899.27 4896.86,5924.71 4986.23,5924.71 ; 4871.42,8349.74 4871.42,8464.27 4896.86,8489.71 4986.23,8489.71 ; 4976.42,3069.74 4976.42,3184.27 5001.86,3209.71 5091.23,3209.71 ; 4991.42,515.61 4991.42,630.15 5016.86,655.59 5106.23,655.59 ; 5236.23,5824.71 5242.06,5830.54 ; 5236.23,8389.71 5242.06,8395.54 ; 5341.23,3109.71 5347.06,3115.54 ; 5356.23,555.59 5362.06,561.42 ; 5486.23,5924.71 5493.53,5917.42 5614.91,5917.42 5640.68,5943.19 5640.68,6665.48 5662.14,6686.94 6185.48,6686.94 ; 5486.23,6404.68 5495.48,6404.68 ; 5486.23,8489.71 5493.53,8482.42 5614.91,8482.42 5640.68,8508.19 5640.68,9230.48 5662.14,9251.94 6185.48,9251.94 ; 5486.23,8969.68 5495.48,8969.68 ; 5591.23,3209.71 5598.53,3202.42 5719.91,3202.42 5745.68,3228.19 5745.68,3950.48 5767.14,3971.94 6290.48,3971.94 ; 5591.23,3689.68 5600.48,3689.68 ; 5606.23,655.59 5613.53,648.29 5734.91,648.29 5760.68,674.06 5760.68,1396.36 5782.14,1417.81 6305.48,1417.81 ; 5606.23,1135.55 5615.48,1135.55 ; 5738.99,5785.12 5738.99,5879.59 5794.94,5935.55 ; 5738.99,8350.12 5738.99,8444.59 5794.94,8500.55 ; 5843.99,3070.12 5843.99,3164.59 5899.94,3220.55 ; 5858.99,516 5858.99,610.46 5914.94,666.42
  Bottom Layer w40: 1517.66,3146.91 1517.66,3218.59 1518.54,3219.47 ; 1547.66,596.91 1547.66,668.59 1548.54,669.47 ; 1552.66,5846.91 1552.66,5918.59 1553.54,5919.47 ; 1582.66,8441.91 1582.66,8513.59 1583.54,8514.47 ; 2351.51,3532.71 2351.51,4316.1 ; 2381.51,982.71 2381.51,1766.1 ; 2386.51,6232.71 2386.51,7016.1 ; 2416.51,8827.71 2416.51,9611.1 ; 4742.66,5856.91 4742.66,5928.59 4743.54,5929.47 ; 4742.66,8421.91 4742.66,8493.59 4743.54,8494.47 ; 4847.66,3141.91 4847.66,3213.59 4848.54,3214.47 ; 4862.66,587.78 4862.66,659.46 4863.54,660.34 ; 5576.52,6242.71 5576.52,7026.1 ; 5576.52,8807.71 5576.52,9591.1 ; 5681.52,3527.71 5681.52,4311.1 ; 5696.52,973.58 5696.52,1756.98
  Bottom Layer w50: 1503.48,3655.94 1506.23,3655.94 1607.52,3554.66 1931.26,3554.66 2070.05,3693.45 2261.23,3693.45 ; 1503.48,3855.94 1423.56,3855.94 1385.38,3894.12 1385.38,4417.07 1425.25,4456.94 1511.48,4456.94 1640.93,4586.39 1910.28,4586.39 ; 1511.48,4256.94 1855.48,4256.94 1910.28,4311.74 1910.28,4402.53 2265.09,4402.53 2351.51,4316.1 ; 1533.48,1105.94 1536.23,1105.94 1637.52,1004.66 1961.26,1004.66 2100.05,1143.45 2291.23,1143.45 ; 1533.48,1305.94 1453.56,1305.94 1415.38,1344.12 1415.38,1867.07 1455.25,1906.94 1541.48,1906.94 1670.93,2036.39 1940.28,2036.39 ; 1538.48,6355.94 1541.23,6355.94 1642.52,6254.66 1966.26,6254.66 2105.05,6393.45 2296.23,6393.45 ; 1538.48,6555.94 1458.56,6555.94 1420.38,6594.12 1420.38,7117.07 1460.25,7156.94 1546.48,7156.94 1675.93,7286.39 1945.28,7286.39 ; 1541.48,1706.94 1885.48,1706.94 1940.28,1761.74 1940.28,1852.53 2295.09,1852.53 2381.51,1766.1 ; 1546.48,6956.94 1890.48,6956.94 1945.28,7011.74 1945.28,7102.53 2300.09,7102.53 2386.51,7016.1 ; 1568.48,8950.94 1571.23,8950.94 1672.52,8849.66 1996.26,8849.66 2135.05,8988.45 2326.23,8988.45 ; 1568.48,9150.94 1488.56,9150.94 1450.38,9189.12 1450.38,9712.07 1490.25,9751.94 1576.48,9751.94 1705.93,9881.39 1975.28,9881.39 ; 1576.48,9551.94 1920.48,9551.94 1975.28,9606.74 1975.28,9697.53 2330.09,9697.53 2416.51,9611.1 ; 2017.06,3120.54 2017.06,3398.34 2100.11,3481.39 2300.2,3481.39 2351.51,3532.71 ; 2047.06,570.54 2047.06,848.34 2130.11,931.39 2330.2,931.39 2381.51,982.71 ; 2052.06,5820.54 2052.06,6098.34 2135.11,6181.4 2335.2,6181.4 2386.51,6232.71 ; 2082.06,8415.54 2082.06,8693.34 2165.11,8776.4 2365.2,8776.4 2416.51,8827.71 ; 4728.48,6365.94 4731.23,6365.94 4832.52,6264.66 5156.26,6264.66 5295.05,6403.45 5486.23,6403.45 ; 4728.48,6565.94 4648.56,6565.94 4610.38,6604.12 4610.38,7127.07 4650.25,7166.94 4736.48,7166.94 4865.93,7296.39 5135.28,7296.39 ; 4728.48,8930.94 4731.23,8930.94 4832.52,8829.66 5156.26,8829.66 5295.05,8968.45 5486.23,8968.45 ; 4728.48,9130.94 4648.56,9130.94 4610.38,9169.12 4610.38,9692.07 4650.25,9731.94 4736.48,9731.94 4865.93,9861.39 5135.28,9861.39 ; 4736.48,6966.94 5080.48,6966.94 5135.28,7021.74 5135.28,7112.53 5490.09,7112.53 5576.52,7026.1 ; 4736.48,9531.94 5080.48,9531.94 5135.28,9586.74 5135.28,9677.53 5490.09,9677.53 5576.52,9591.1 ; 4833.48,3650.94 4836.23,3650.94 4937.52,3549.66 5261.26,3549.66 5400.05,3688.45 5591.23,3688.45 ; 4833.48,3850.94 4753.56,3850.94 4715.38,3889.12 4715.38,4412.07 4755.25,4451.94 4841.48,4451.94 4970.93,4581.39 5240.28,4581.39 ; 4841.48,4251.94 5185.48,4251.94 5240.28,4306.74 5240.28,4397.53 5595.09,4397.53 5681.52,4311.1 ; 4848.48,1096.81 4851.23,1096.81 4952.52,995.53 5276.26,995.53 5415.05,1134.33 5606.23,1134.33 ; 4848.48,1296.81 4768.56,1296.81 4730.38,1335 4730.38,1857.94 4770.25,1897.81 4856.48,1897.81 4985.93,2027.26 5255.28,2027.26 ; 4856.48,1697.81 5200.48,1697.81 5255.28,1752.62 5255.28,1843.4 5610.09,1843.4 5696.52,1756.98 ; 5242.06,5830.54 5242.06,6108.34 5325.11,6191.4 5525.2,6191.4 5576.52,6242.71 ; 5242.06,8395.54 5242.06,8673.34 5325.11,8756.4 5525.2,8756.4 5576.52,8807.71 ; 5347.06,3115.54 5347.06,3393.34 5430.11,3476.39 5630.2,3476.39 5681.52,3527.71 ; 5362.06,561.42 5362.06,839.22 5445.11,922.27 5645.2,922.27 5696.52,973.58

## Polygon pours and split planes (outlines as drawn)
no net on Bottom Layer "Bottom Layer-No Net" (solid, pour order 24): 4544.51,9964.87 4548.05,9961.33 4548.05,8204.47 4562.22,8190.3 6428.89,8190.3 6428.89,9961.33 6421.8,9968.42 4551.59,9968.42 4548.05,9964.87
no net on Bottom Layer "Bottom Layer-No Net" (solid, pour order 22): 1384.51,9984.87 1388.05,9981.33 1388.05,8224.47 1402.22,8210.3 3268.89,8210.3 3268.89,9981.33 3261.8,9988.42 1391.59,9988.42 1388.05,9984.87
no net on Bottom Layer "Bottom Layer-No Net" (solid, pour order 18): 4544.51,7399.87 4548.05,7396.33 4548.05,5639.47 4562.22,5625.3 6428.89,5625.3 6428.89,7396.33 6421.8,7403.41 4551.59,7403.41 4548.05,7399.87
no net on Bottom Layer "Bottom Layer-No Net" (solid, pour order 16): 1354.51,7389.87 1358.05,7386.33 1358.05,5629.47 1372.22,5615.3 3238.89,5615.3 3238.89,7386.33 3231.8,7393.41 1361.59,7393.41 1358.05,7389.87
no net on Bottom Layer "Bottom Layer-No Net" (solid, pour order 14): 4664.51,2130.75 4668.05,2127.21 4668.05,370.34 4682.22,356.17 6548.89,356.17 6548.89,2127.21 6541.8,2134.29 4671.59,2134.29 4668.05,2130.75
no net on Bottom Layer "Bottom Layer-No Net" (solid, pour order 12): 1349.51,2139.87 1353.05,2136.33 1353.05,379.47 1367.22,365.3 3233.89,365.3 3233.89,2136.33 3226.8,2143.41 1356.59,2143.41 1353.05,2139.87
no net on Bottom Layer "Bottom Layer-No Net" (solid, pour order 10): 4649.51,4684.87 4653.05,4681.33 4653.05,2924.47 4667.22,2910.3 6533.89,2910.3 6533.89,4681.33 6526.8,4688.41 4656.59,4688.41 4653.05,4684.87
no net on Bottom Layer "Bottom Layer-No Net" (solid, pour order 8): 1319.51,4689.87 1323.05,4686.33 1323.05,2929.47 1337.22,2915.3 3203.89,2915.3 3203.89,4686.33 3196.8,4693.41 1326.59,4693.41 1323.05,4689.87

## Keep-outs
Keep-Out Layer:
  lines w20: 1311.81,2911.08 1311.81,4707.18 3220.49,4707.18 3220.49,2911.08 1311.81,2911.08 ; 1341.81,361.08 1341.81,2157.18 3250.49,2157.18 3250.49,361.08 1341.81,361.08 ; 1346.81,5611.08 1346.81,7407.18 3255.49,7407.18 3255.49,5611.08 1346.81,5611.08 ; 1376.81,8206.08 1376.81,10002.18 3285.49,10002.18 3285.49,8206.08 1376.81,8206.08 ; 4536.81,5621.08 4536.81,7417.18 6445.49,7417.18 6445.49,5621.08 4536.81,5621.08 ; 4536.81,8186.08 4536.81,9982.18 6445.49,9982.18 6445.49,8186.08 4536.81,8186.08 ; 4641.81,2906.08 4641.81,4702.18 6550.49,4702.18 6550.49,2906.08 4641.81,2906.08 ; 4656.81,351.96 4656.81,2148.05 6565.49,2148.05 6565.49,351.96 4656.81,351.96

## Silkscreen, mask and mechanical layers (free items; w line width, h text height)
Top Overlay:
  text "IN 220V AC" at 1401.73,9813.53 h50 r270
  text "IN 220V AC" at 4561.73,9793.53 h50 r270
  text "LOAD" at 1404.38,9141.01 h50 r270
  text "LOAD" at 4564.38,9121.01 h50 r270
  text "ESP 8266" at 2638.42,8752.24 h50
  text "ESP 8266" at 5798.42,8732.24 h50
  text "3,3V" at 2891.99,8651.41 h50
  text "3,3V" at 6051.98,8631.41 h50
  text "RX" at 2927.6,8552.2 h50
  text "RX" at 6087.6,8532.2 h50
  text "TX" at 2925.9,8452.99 h50
  text "TX" at 6085.9,8432.99 h50
  text "GND" at 2867.39,8355.48 h50
  text "GND" at 6027.39,8335.48 h50
  text "IN 220V AC" at 4561.73,7228.53 h50 r270
  text "IN 220V AC" at 1371.73,7218.53 h50 r270
  text "LOAD" at 4564.38,6556.01 h50 r270
  text "LOAD" at 1374.38,6546.01 h50 r270
  text "ESP 8266" at 5798.42,6167.24 h50
  text "ESP 8266" at 2608.42,6157.24 h50
  text "3,3V" at 6051.98,6066.41 h50
  text "3,3V" at 2861.99,6056.41 h50
  text "RX" at 6087.6,5967.2 h50
  text "RX" at 2897.6,5957.2 h50
  text "TX" at 6085.9,5867.99 h50
  text "TX" at 2895.9,5857.99 h50
  text "GND" at 6027.39,5770.48 h50
  text "GND" at 2837.39,5760.48 h50
  text "IN 220V AC" at 1336.73,4518.53 h50 r270
  text "IN 220V AC" at 4666.73,4513.53 h50 r270
  text "LOAD" at 1339.38,3846.01 h50 r270
  text "LOAD" at 4669.38,3841.01 h50 r270
  text "ESP 8266" at 2573.42,3457.24 h50
  text "ESP 8266" at 5903.42,3452.24 h50
  text "3,3V" at 2826.99,3356.41 h50
  text "3,3V" at 6156.98,3351.41 h50
  text "RX" at 2862.6,3257.2 h50
  text "RX" at 6192.6,3252.2 h50
  text "TX" at 2860.9,3157.99 h50
  text "TX" at 6190.9,3152.99 h50
  text "GND" at 2802.39,3060.48 h50
  text "GND" at 6132.39,3055.48 h50
  text "IN 220V AC" at 1366.73,1968.53 h50 r270
  text "IN 220V AC" at 4681.73,1959.41 h50 r270
  text "LOAD" at 1369.38,1296.01 h50 r270
  text "LOAD" at 4684.38,1286.89 h50 r270
  text "ESP 8266" at 2603.42,907.24 h50
  text "ESP 8266" at 5918.42,898.12 h50
  text "3,3V" at 2856.99,806.41 h50
  text "3,3V" at 6171.98,797.29 h50
  text "RX" at 2892.6,707.2 h50
  text "RX" at 6207.6,698.08 h50
  text "TX" at 2890.9,607.99 h50
  text "TX" at 6205.9,598.87 h50
  text "GND" at 2832.39,510.48 h50
  text "GND" at 6147.39,501.35 h50

## Text inside footprints (layer, text, board x,y; h text height)
_1: Top Overlay "8" at 6283.48,3712.94 h50; Top Overlay "7" at 6283.48,3612.94 h50; Top Overlay "1" at 5843.48,3612.94 h50; Top Overlay "2" at 5823.48,3712.94 h50
_1: Top Overlay "Nguon AC DC MINI" at 5218.18,4150.09 h80
_2: Top Overlay "8" at 2983.48,1167.94 h50; Top Overlay "7" at 2983.48,1067.94 h50; Top Overlay "1" at 2543.48,1067.94 h50; Top Overlay "2" at 2523.48,1167.94 h50
_2: Top Overlay "Nguon AC DC MINI" at 1918.18,1605.09 h80
_3: Top Overlay "8" at 6298.48,1158.81 h50; Top Overlay "7" at 6298.48,1058.81 h50; Top Overlay "1" at 5858.48,1058.81 h50; Top Overlay "2" at 5838.48,1158.81 h50
_3: Top Overlay "Nguon AC DC MINI" at 5233.18,1595.97 h80
_4: Top Overlay "8" at 2988.48,6417.94 h50; Top Overlay "7" at 2988.48,6317.94 h50; Top Overlay "1" at 2548.48,6317.94 h50; Top Overlay "2" at 2528.48,6417.94 h50
_4: Top Overlay "Nguon AC DC MINI" at 1923.18,6855.09 h80
_5: Top Overlay "8" at 6178.48,6427.94 h50; Top Overlay "7" at 6178.48,6327.94 h50; Top Overlay "1" at 5738.48,6327.94 h50; Top Overlay "2" at 5718.48,6427.94 h50
_5: Top Overlay "Nguon AC DC MINI" at 5113.18,6865.09 h80
_6: Top Overlay "8" at 6178.48,8992.94 h50; Top Overlay "7" at 6178.48,8892.94 h50; Top Overlay "1" at 5738.48,8892.94 h50; Top Overlay "2" at 5718.48,8992.94 h50
_6: Top Overlay "Nguon AC DC MINI" at 5113.18,9430.09 h80
_7: Top Overlay "8" at 3018.48,9012.94 h50; Top Overlay "7" at 3018.48,8912.94 h50; Top Overlay "1" at 2578.48,8912.94 h50; Top Overlay "2" at 2558.48,9012.94 h50
_7: Top Overlay "Nguon AC DC MINI" at 1953.18,9450.09 h80
NguonKhongVo_1: Top Overlay "Nguon AC DC MINI" at 1888.18,4155.09 h80
P1: Top Overlay "8" at 2953.48,3717.94 h50; Top Overlay "7" at 2953.48,3617.94 h50; Top Overlay "1" at 2513.48,3617.94 h50; Top Overlay "2" at 2493.48,3717.94 h50